# EAGLE board Esquema (EAGLE 9.6.2)
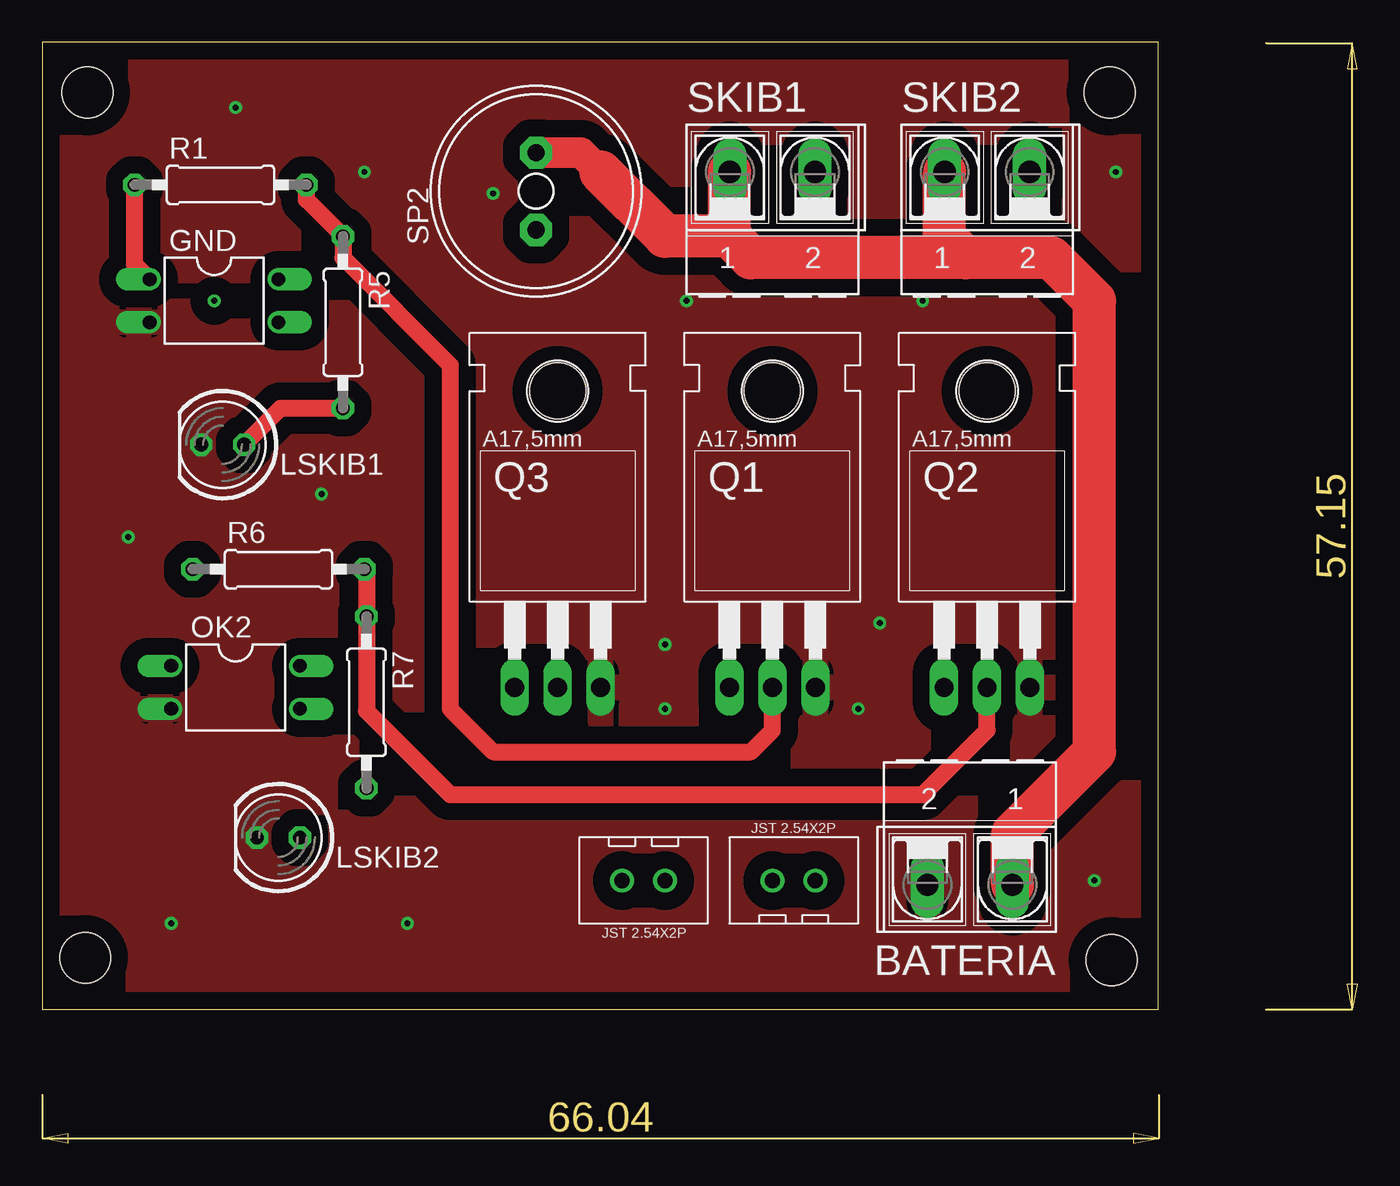
[diagram p0: board, top side]
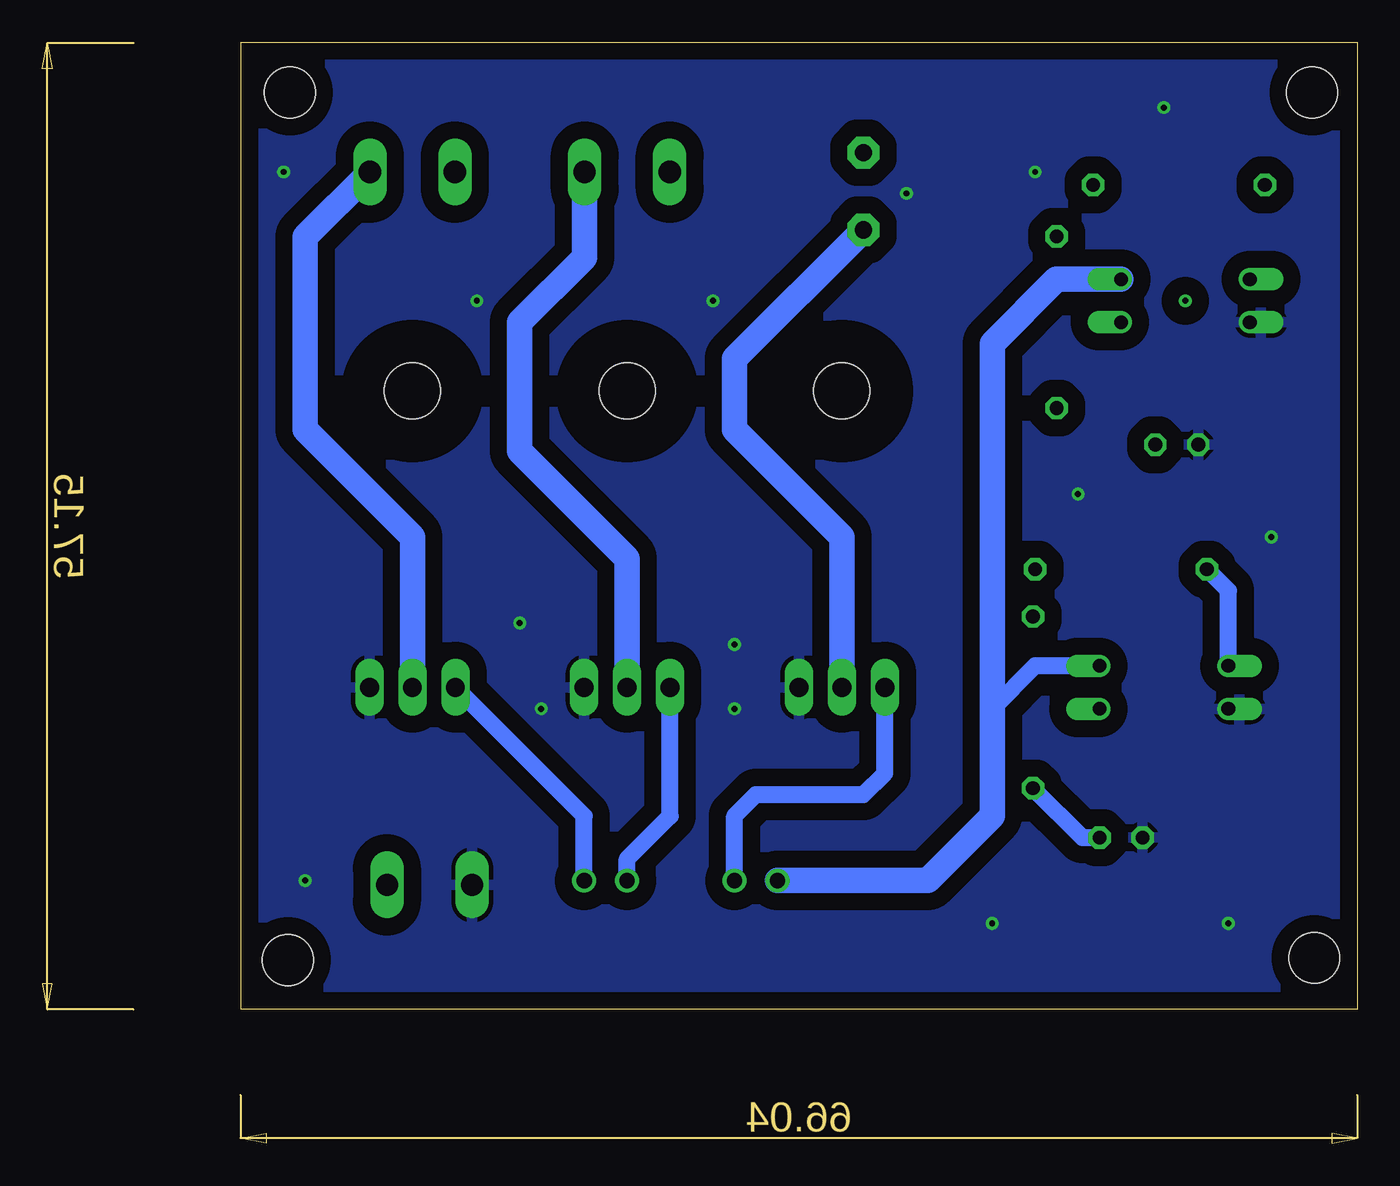
[diagram p1: board, bottom side, seen from below]

Size 66.02 x 57.2 mm. Coordinates in mm from the lower left corner, seen from the top.
Outline: 0,0 66.02,0 66.02,57.2 0,57.2 0,0
Copper layers (1*16): Top 0.035mm / dielectric 1.5mm / Bottom 0.035mm
Design rules "default *": minimum track width 1mm, minimum drill 0.35mm, track to track 40mil, track to pad 0.5mm, pad to pad 6mil, via to via 6mil, smd to smd 6mil, copper to edge 40mil, drill to drill 6mil, minimum pad ring 10mil, minimum via ring 8mil, stop-mask expansion 4mil, vias tented up to drill 0mil, thermal gap 10mil
Holes 3 mm at 2.67,54.23 63.12,54.23 2.54,3.05 63.25,2.92

## Footprints (pad centres in the part's own frame; a part is rotated, then mirrored left to right if it is on the bottom)
AK500/2-H = drill 1.321 long: 1 -2.515,0; 2 2.515,0
DIL04 = drill 0.813 offset: 1 -1.27,-3.81; 2 1.27,-3.81; 3 1.27,3.81; 4 -1.27,3.81
LED5MM = drill 0.813 octagon: A -1.27,0; K 1.27,0
TO220 = drill 1.118 long: 1 -2.54,-6.35; 2 0,-6.35; 3 2.54,-6.35 | hole 3.302: 0,11.176
0207/10 = drill 0.813 octagon: 1 -5.08,0; 2 5.08,0
AL11P = drill 1.016 pad 1.905 octagon: + 2.286,0; - -2.286,0
JST2.54X2P_FOOTPRINT = drill 0.9: 1 -1.27,0; 2 1.27,0

## Placement (x,y rotation side)
BATERIA  [AK500/2-H]  54.86,7.37 180 top
GND  PC817  [DIL04]  10.16,41.91 270 top
LSKIB1  5mm  [LED5MM]  10.67,33.4 180 top
LSKIB2  5mm  [LED5MM]  13.97,10.16 180 top
OK2  PC817  [DIL04]  11.43,19.05 270 top
Q1  IRF540  [TO220]  43.18,25.4 0 top
Q2  IRF540  [TO220]  55.88,25.4 0 top
Q3  IRF540  [TO220]  30.48,25.4 0 top
R1  1k  [0207/10]  10.54,48.77 0 top
R2  1k  [0207/10]  -13.97,1.27 180 bottom  (outside the outline)
R3  1k  [0207/10]  -13.97,6.35 0 top  (outside the outline)
R4  1k  [0207/10]  -13.97,11.43 0 top  (outside the outline)
R5  1k  [0207/10]  17.78,40.64 270 top
R6  1k  [0207/10]  13.97,26.04 0 top
R7  1k  [0207/10]  19.18,18.16 270 top
SKIB1  [AK500/2-H]  43.18,49.53 0 top
SKIB2  [AK500/2-H]  55.88,49.53 0 top
SP2  AL11P  [AL11P]  29.21,48.39 90 top
U$1  JST2.54X2P  [JST2.54X2P_FOOTPRINT]  35.56,7.62 180 top
U$2  JST2.54X2P  [JST2.54X2P_FOOTPRINT]  44.45,7.62 0 top

## Library data of the parts
BATERIA SKIB1 SKIB2 = con-ptr500; OC_FARNELL: unknown; OC_NEWARK: unknown
GND OK2 = optocoupler; MPN: PC817X4J000F; OC_FARNELL: 9707727; OC_NEWARK: 97K7059
LSKIB1 LSKIB2 = led
Q1-Q3 = transistor-fet
R1-R7 = rcl; SPICEPREFIX: R
SP2 = buzzer; OC_FARNELL: unknown; OC_NEWARK: unknown
U$1 U$2 = CRD

## Nets
3.3V: GND.4 OK2.4 U$1.2
BUZZER: Q3.1 U$1.1
GND: BATERIA.2 GND.2 LSKIB1.K LSKIB2.K OK2.2 Q1.3 Q2.3 Q3.3
N$1: LSKIB2.A R7.2
N$2: Q3.2 SP2.-
N$3: LSKIB1.A R5.2
N$4: GND.1 R1.1
N$5: OK2.1 R6.1
SINAL_SKIB1: GND.3
SINAL_SKIB2: OK2.3
SKIB1: Q1.1 U$2.1
SKIB1_CONECTOR: Q1.2 R1.2 R5.1 SKIB1.2
SKIB2: Q2.1 U$2.2
SKIB2_CONECTOR: Q2.2 R6.2 R7.1 SKIB2.2
VCC: BATERIA.1 SKIB1.1 SKIB2.1 SP2.+

## Tracks (layer width: path | path; a pad name or v marks a point on that pad's centre or on a via)
3.3V
  Bottom 1: OK2.4 19.05,20.32 21.59,17.78
  Bottom 1.5: U$1.2 25.4,7.62 21.59,11.43 21.59,17.78 21.59,39.37 17.78,43.18 GND.4
BUZZER
  Bottom 1: U$1.1 36.83,11.43 35.56,12.7 29.21,12.7 27.94,13.97 Q3.1
GND  (via drill 0.35)
  other vias: 7.62,5.08 21.59,5.08 5.08,27.94 11.43,53.34 19.05,49.53 26.67,48.26 63.5,49.53 38.1,41.91 52.07,41.91 36.83,21.59 49.53,22.86 62.23,7.62 48.26,17.78 36.83,17.78 16.51,30.48
  pour Bottom: 0.38,56.77 0.38,0.38 65.66,0.38 65.66,56.77
  pour Top: 0,57.15 66.04,57.15 66.04,0 0,0
N$1
  Bottom 1: R7.2 16.26,10.16 LSKIB2.A
N$2
  Bottom 1.5: SP2.- 36.83,38.48 36.83,34.29 30.48,27.94 Q3.2
N$3
  Top 1: LSKIB1.A 14.1,35.56 R5.2
N$4
  Top 1: GND.1 5.46,44.07 R1.1
N$5
  Bottom 1: OK2.1 7.62,24.77 R6.1
N$8  (via drill 0.35)
  other vias: 10.16,41.91
SKIB1
  Bottom 1: U$2.1 43.18,8.89 40.64,11.43 Q1.1
SKIB1_CONECTOR
  Top 1: R1.2 15.62,47.88 R5.1 17.78,44.45 24.13,38.1 24.13,17.78 26.67,15.24 41.91,15.24 43.18,16.51 Q1.2
  Bottom 1.5: Q1.2 43.18,26.67 49.53,33.02 49.53,40.64 45.7,44.48 SKIB1.2
SKIB2
  Bottom 1: U$2.2 45.72,11.43 Q2.1
SKIB2_CONECTOR
  Top 1: R6.2 19.18,25.91 R7.1 19.18,17.65 24.13,12.7 52.07,12.7 55.88,16.51 Q2.2
  Bottom 1.5: SKIB2.2 62.23,45.7 62.23,34.29 55.88,27.94 Q2.2
VCC
  Top 1.8: 33.02,49.53 31.88,50.67 SP2.+
  Top 2.54: BATERIA.1 57.38,10.39 62.23,15.24 62.23,41.91 59.69,44.45 54.61,44.45 | 54.61,44.45 53.37,45.7 SKIB2.1 | 54.61,44.45 41.91,44.45 40.64,45.72 | 40.64,45.72 40.64,49.53 SKIB1.1 | 40.64,45.72 36.83,45.72 33.02,49.53